# Altium PCB PCB2.PcbDoc
Units mm, origin at the board's own origin, x right, y up, seen from the top; angles counter-clockwise.
Board outline 40 x 20 mm, 2 copper layers (Top Layer, Bottom Layer); 17 components, 13 nets, 55 pads, 2 vias.
Unrouted connection lines stored in the file: 2.
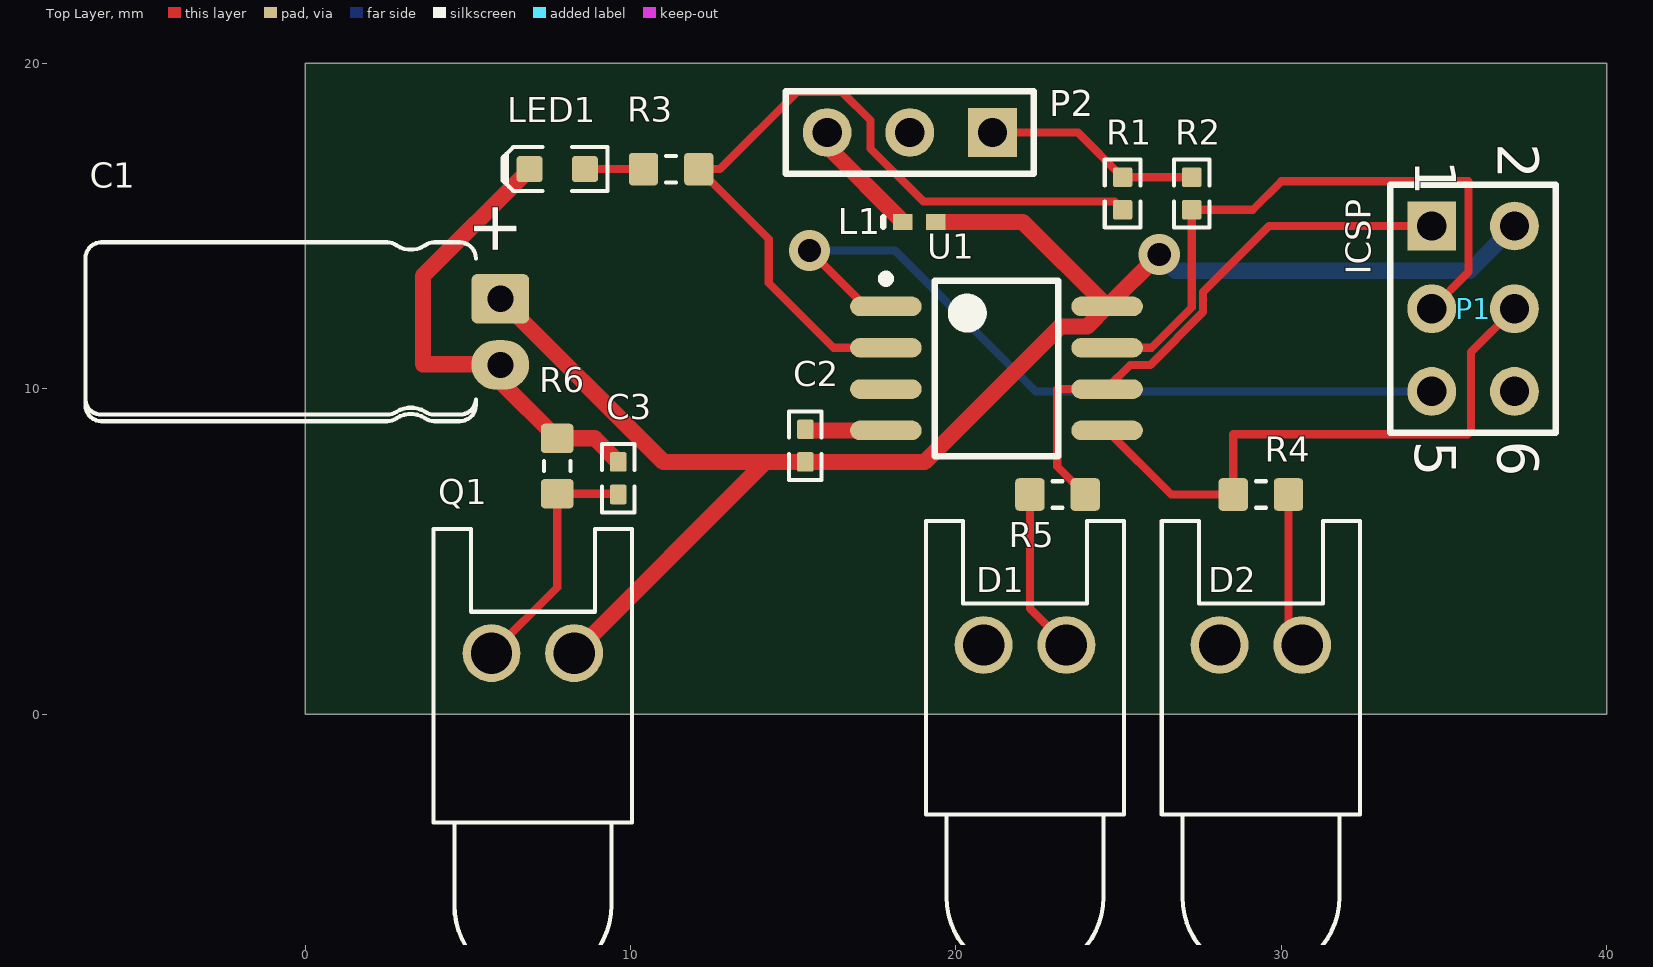
[diagram p0: Top Layer view]
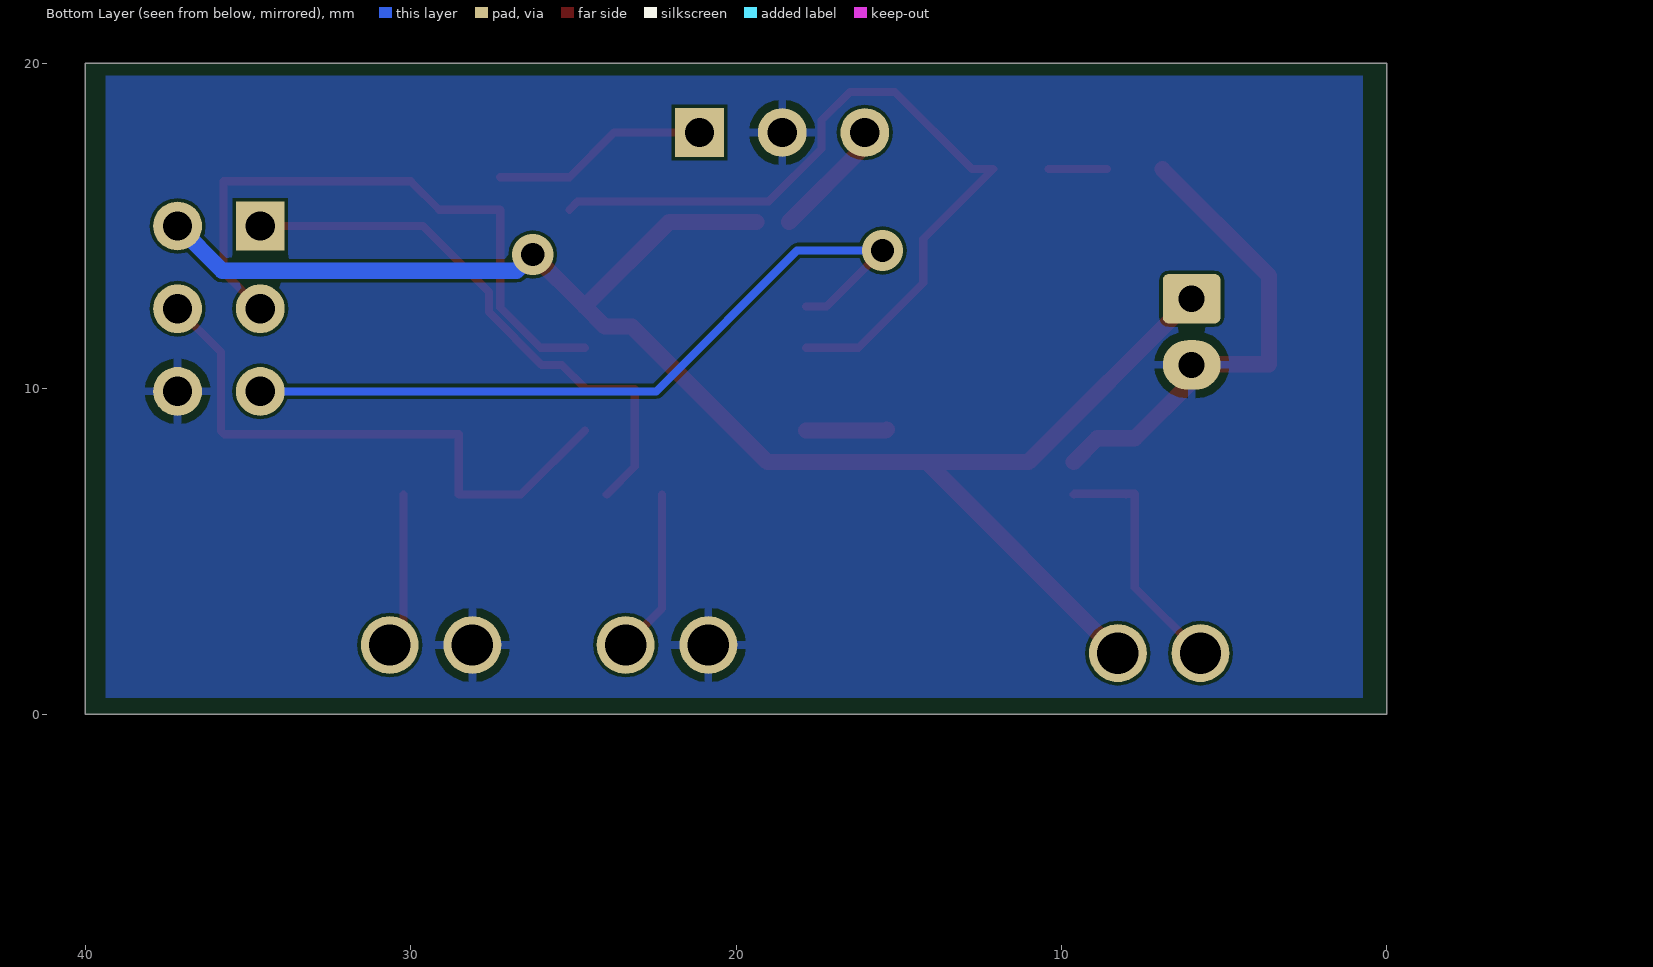
[diagram p1: Bottom Layer view, seen from below]
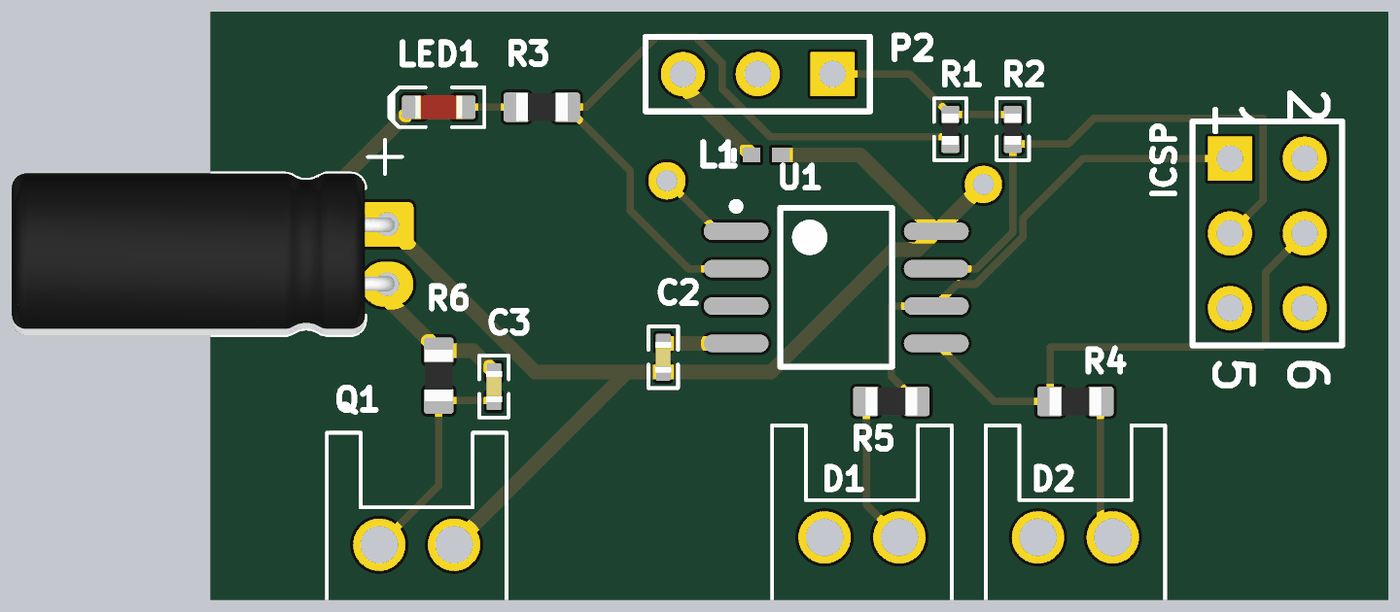
[diagram p2: 3D render of the assembled board from above, using the file's embedded part models]

## Layer stack, top to bottom
Top Solder: solder mask 0.0102, Solder Resist, Dk 3.5
Top Layer: signal copper 0.0356
Dielectric1: dielectric 0.32, FR-4, Dk 4.8
Bottom Layer: signal copper 0.0356
Bottom Solder: solder mask 0.0102, Solder Resist, Dk 3.5

## Board outline
0,0 0,20 40,20 40,0

## Design rules (kind name [scope] priority, off if disabled: settings)
Clearance [All] p1: gap=0.1
FabricationTestPointUsage TestPointUsage [All] p1: valid=0 allowmultiple=FALSE
FabricationTestpoint Testpoint [All] p1: side=3 testpointundercomponent=TRUE minsize=1.016 maxsize=2.54 preferedsize=1.524 minholesize=0 maxholesize=1.016 preferedholesize=0.813 testpointgrid=0.025 allowsidetop=TRUE allowsidebottom=TRUE usegrid=TRUE gridtolerance=0
PolygonConnect [All] p1: connectstyle=Relief reliefconductorwidth=0.254 reliefentries=4 polygonreliefangle="90 Angle" airgapwidth=0.254
RoutingVias [All] p1: holewidth=0.6 width=1 viastyle="Through Hole" minholewidth=0.6 minwidth=1 maxholewidth=0.6 maxwidth=1
SilkToSolderMaskClearance SilkscreenOverComponentPads [IsPad] p1: minsilkscreentomaskgap=0.254 clearancetoexposedcopper=TRUE
SolderMaskExpansion [All] p1: expansion=0.102
Width Width_Power [(InNet('5V') OR InNet('GND') OR InNet('VCC'))] p1: maxlimit=0.5 minlimit=0.2 preferedwidth=0.5 minimp=50.000000 maximp=50.000000 favimp=50.000000
Width [All] p2: maxlimit=0.25 minlimit=0.2 preferedwidth=0.25 minimp=50.000000 maximp=50.000000 favimp=50.000000
27 further rules are at their usual default settings.

## Components (designator, comment, footprint, x,y, rotation, side; value= is the part's Value field where it differs from the comment)
C1 "100µ" CAPAE200P550X1200_FLAT2 6,11.75 r90 top
C2 "100n" CAPC1005X55N 15.375,8.25 r270 top
C3 "1n" CAPC1005X55N 9.625,7.25 r90 top
D1 "GL480E" LED-0 22.125,2.125 r0 top
D2 "GL480E" LED-0 29.375,2.125 r0 top
L1 "Inductor" 0402-A 18.875,15.125 r0 top
LED1 "Red" LED-0603-RED 7.75,16.75 r180 top
P1 "ICSP" HDR2X3 34.625,15 r270 top
P2 "Header 3" HDR1X3 21.125,17.875 r180 top
Q1 "SFH3100F" LED-0 7,1.875 r0 top
R1 "Thick Film" RESC1005X40N 25.125,16 r90 top
R2 "Thick Film" RESC1005X40N 27.25,16 r90 top
R3 "Thick Film" RESC1608X55N 11.25,16.75 r180 top
R4 "Thick Film" RESC1608X55N 29.375,6.75 r180 top
R5 "Thick Film" RESC1608X55N 23.125,6.75 r0 top
R6 "Thick Film" RESC1608X55N 7.75,7.625 r270 top
U1 "ATtiny45-20SH" 8S2_N 21.25,10.625 r0 top

## Footprints (in the part's own frame and the unit in brackets; to place one, negate y for a bottom-side part, rotate by r counter-clockwise, add the part's x,y. Pads: shape width x height; smd on the part's side, far side on the other; paste and mask are expansions set on the pad)
8S2_N [mm] "SOP, 8-Leads, Body 5.3x5.3mm, Pitch 1.27mm, IPC Medium Density"
  oval 2.2x0.6 smd: 1(-3.4,1.905) 2(-3.4,0.635) 3(-3.4,-0.635) 4(-3.4,-1.905) 5(3.4,-1.905) 6(3.4,-0.635) 7(3.4,0.635) 8(3.4,1.905)
  silkscreen extent -3.52,-2.7 1.9,2.88, body extent -2.7,-2.68 2.7,2.68, height 2.16
0402-A [mm] "Chip Inductor, Body 1.0x0.5mm, IPC High Density"
  rect 0.6x0.5 smd: 1(-0.5,0) 2(0.5,0)
  silkscreen extent -1.1,-0.15 -1.1,0.15, body extent -0.55,-0.3 0.55,0.3, height 0.55
CAPAE200P550X1200_FLAT2 [mil]
  round 20 on Mech15: 0(0,0)
  rrect25% 60x70 hole 31.5: 1(40,0)
  oval 60x70 hole 31.5: 2(-40,0)
  silkscreen extent -108,30 108,502, body extent -107,-10 107,502, height 216
CAPC1005X55N [mm] "Chip Capacitor, Body 1.0x0.5mm, EIA 0402, IPC Medium Density"
  round 0.2 on Mech15: 0(0,0)
  rrect20% 0.6x0.5 smd: 1(-0.5,0) 2(0.5,0)
  Top Layer pour cut-out: -0.325,0.375 -0.2,0.5 0.2,0.5 0.325,0.375 0.325,-0.375 0.2,-0.5 -0.2,-0.5 -0.325,-0.375
  silkscreen extent -1.05,-0.5 1.05,0.5, body extent -0.52,-0.27 0.53,0.28, height 0.55
HDR1X3 [mm] "Connector; Header; 3 Position"
  rect 1.5x1.5 hole 0.9: 1(0,0)
  round 1.5 hole 0.9: 2(2.54,0) 3(5.08,0)
  silkscreen extent -1.27,-1.27 6.35,1.27
HDR2X3 [mm] "Connector; Header; 3x2 Position"
  rect 1.5x1.5 hole 0.9: 1(0,0)
  round 1.5 hole 0.9: 2(0,2.54) 3(2.54,0) 4(2.54,2.54) 5(5.08,0) 6(5.08,2.54)
  silkscreen extent -1.27,-1.27 6.35,3.81
LED-0 [mil] "LED; 2 Leads"
  round 70 hole 50: 1(50,0) 2(-50,0)
  silkscreen extent -120,-400 120,150
LED-0603-RED [mm]
  round 0.254 on Mech15: 0(0,0)
  rrect25% 0.8x0.8 smd: A(-0.85,0) K(0.85,0)
  Top Layer pour cut-out: -0.5,0.5 0.5,0.5 0.5,-0.5 -0.5,-0.5
  silkscreen extent -1.55,-0.68 1.68,0.67, body extent -0.8,-0.4 0.8,0.4, height 0.75
RESC1005X40N [mm] "Chip Resistor, Body 1.0x0.5mm, EIA 0402, IPC Medium Density"
  round 0.2 on Mech15: 0(0,0)
  rrect20% 0.6x0.6 smd: 1(-0.5,0) 2(0.5,0)
  Top Layer pour cut-out: -0.325,0.375 -0.2,0.5 0.2,0.5 0.325,0.375 0.325,-0.375 0.2,-0.5 -0.2,-0.5 -0.325,-0.375
  silkscreen extent -1.05,-0.55 1.05,0.55, body extent -0.52,-0.27 0.53,0.28, height 0.4
RESC1608X55N [mm] "Chip Resistor, Body 1.6x0.8mm, EIA 0603, IPC Medium Density"
  round 0.254 on Mech15: 0(0,0)
  rrect25% 0.9x1 smd: 1(-0.85,0) 2(0.85,0)
  Top Layer pour cut-out: -0.6,0.5 -0.4,0.7 0.4,0.7 0.6,0.5 0.6,-0.5 0.4,-0.7 -0.4,-0.7 -0.6,-0.5
  silkscreen extent -0.15,-0.41 0.15,0.41, body extent -0.87,-0.47 0.88,0.48, height 0.54

## Part data
C1: library part CAPE_100u_16V_THD, "Capacitor THD Electrolytic 100uF 20% 16V Radial"
C2: library part CAPC_100n_0402_X5R_16V_10%, "Capacitor SMD Cer 100nF 10% 16V X5R 0402"
C3: library part CAPC_1n_0402_X7R_16V_10%, "Capacitor SMD Cer 1nF 10% 16V X7R 0402"
D1 D2: library part LED0, "Typical INFRARED GaAs LED"
LED1: library part LED_SMD_Red_0603_220mcd, "LED 0603 SMD Hyper Red 630nm 220mcd 20mA"
P1: library part "Header 3X2", "Header, 3-Pin, Dual row"
P2: "Header, 3-Pin"
Q1: library part LED0, "IR Phototransistor"
R1 R2: library part RES_10K_0402_1%, "Resistor SMD chip 10k Ohm 0.063W 1% 0402"
R3: library part RES_330R_0603_5%, "Resistor SMD chip 330 Ohm 0.1W 5% 0603"
R4 R5 R6: library part RES_2K2_0603_5%, "Resistor SMD chip 2.2k Ohm 0.1W 5% 0603"
U1: "8-bit AVR Microcontroller, 20MHz, 2.7-5.5V, 4K Flash, 256 Bytes EEPROM, 256 Bytes SRAM, Industrial Grade (-40°C to 85°C), 8-Lead SOIC, Pb-Free"

## Via types
v1: diameter 1.27, hole 0.711, Top Layer to Bottom Layer, 2 vias

## Nets (pads, with @x,y where several pads share a name; then routed paths per layer and width w, separated by ;. In a path a pad name is that pad's centre, name@x,y a point inside that pad or via, vN(x,y) a via of type N, cw(c..) or ccw(c..) an arc to the next point about the centre after c; other vN are vias at no path point)
5V: C1.1 C2.2 L1.2 P1.2 Q1.1 U1.8 | length 51.5
  Top Layer w0.5: C1.1 11.016,7.75 14.145,7.75 ; Q1.1 14.145,7.75 ; L1.2 22.055,15.125 U1.8 ; v1(26.25,14.125) 24.655,12.53 U1.8 ; 14.145,7.75 C2.2 19.04,7.75 23.2,11.91 24.03,11.91 U1.8
  Bottom Layer w0.5: v1@26.125,14.25 26.75,13.625 35.79,13.625 P1.2
GND: C1.2 C2.1 C3.2 D1.2 D2.2 LED1.K P1.6 P2.2 R6.1 U1.4 | length 17.9
  Top Layer w0.5: C1.2 6,10.225 R6.1 8.9,8.475 C3.2 ; C1.2@6,10.75 3.625,10.75 3.625,13.475 LED1.K ; C2.1 15.405,8.72 U1.4 ; D1.2 D1.2@21.375,2.125
NetC3_1: C3.1 Q1.2 R6.2 U1.3 | length 7.7
  Top Layer w0.25: Q1.2 7.75,3.895 R6.2 R6.2@8,6.775 ; R6.2@8.025,6.75 R6.2@8,6.775 ; C3.1 9.6,6.775 R6.2@8,6.775
NetD1_1: D1.1 R5.1 | length 5.1
  Top Layer w0.25: R5.1 22.275,3.245 D1.1
NetD2_1: D2.1 R4.1 | length 4.8
  Top Layer w0.25: R4.1 30.225,2.545 D2.1
NetLED1_A: LED1.A R3.2 | length 1.8
  Top Layer w0.25: LED1.A R3.2
NetP1_1: P1.1 R5.2 U1.6 | length 17.6
  Top Layer w0.25: R5.2 23.115,7.61 23.115,9.99 U1.6 24.65,10.025 25.36,10.735 25.98,10.735 27.6,12.355 27.6,12.975 29.625,15 P1.1
NetP1_3: P1.3 R2.1 U1.7 | length 19.4
  Top Layer w0.25: U1.7 26.01,11.26 27.25,12.5 R2.1 29.125,15.5 30,16.375 35.75,16.375 35.75,13.585 P1.3
NetP1_4: P1.4 R4.2 U1.5 | length 18.2
  Top Layer w0.25: U1.5 26.62,6.75 R4.2 28.525,8.6 35.725,8.6 35.83,8.705 35.83,11.125 P1.4
NetP1_5: P1.5 U1.1 | length 24
  Top Layer w0.25: v1(15.5,14.25) 17.22,12.53 U1.1
  Bottom Layer w0.25: v1(15.5,14.25) 18.125,14.25 22.455,9.92 P1.5
NetR1_1: R1.1 R3.1 U1.2 | length 24.8
  Top Layer w0.25: U1.2 16.24,11.26 14.25,13.25 14.25,14.6 R3.1 12.75,16.75 15.125,19.125 16.5,19.125 17.375,18.25 17.375,17.375 19,15.75 24.875,15.75 R1.1
SIG: P2.1 R1.2 R2.2 | length 6.7
  Top Layer w0.25: P2.1 23.75,17.875 R1.2 R2.2
VCC: L1.1 P2.3 | length 3.7
  Top Layer w0.5: P2.3 16.045,17.455 L1.1
pads on no net: C1.0 C2.0 C3.0 LED1.0 R1.0 R2.0 R3.0 R4.0 R5.0 R6.0

## Polygon pours and split planes (outlines as drawn)
GND on Bottom Layer "GND - BottomLayer" (solid, pour order 0): 0.75,19.625 39.375,19.625 39.375,0.5 37.75,0.5 0.75,0.5

## Silkscreen, mask and mechanical layers (free items; w line width, h text height)
Mechanical 16:
  drawing of 1874 lines, arcs and shapes, not listed
  text "1" at -104.286,110.509 h0.76
  text "2" at -31.642,110.509 h0.76
  text "3" at 41.51,110.509 h0.76
  text "4" at 114.408,110.509 h0.76
  text "A" at -138.627,87.497 h0.76
  text "A" at 148.393,87.497 h0.76
  text "B" at -138.627,39.44 h0.76
  text "B" at 148.393,39.44 h0.76
  text "C" at -138.627,-9.074 h0.76
  text "C" at 148.393,-9.074 h0.76
  text "ENGINEER:" at 33.458,-46.082 h0.76
  text "TITLE:" at 71.558,-46.082 h0.76
  text "PCB DESIGNER:" at 33.458,-53.575 h0.76
  text "D" at -138.627,-57.08 h0.76
  text "D" at 148.393,-57.08 h0.76
  text "DATE:" at 33.458,-61.322 h0.76
  text "PART NO.:" at 71.558,-61.322 h0.76
  text "REV:" at 124.898,-61.322 h0.76
  text "Altium Limited" at 0.438,-63.862 h0.76
  text ".PRINT_DATE" at 34.728,-64.37 h0.76
  text "12a Rodborough Rd" at 0.438,-66.402 h0.76
  text "Frenchs Forest" at 0.438,-68.942 h0.76
  text "FILE NAME:" at 33.458,-68.942 h0.76
  text "DWG NO:" at 71.558,-68.942 h0.76
  text "SCALE:" at 124.898,-68.942 h0.76
  text "NSW 2086" at 0.438,-71.482 h0.76
  text ".PCB_FILE_NAME_NO_PATH" at 34.728,-71.99 h0.76
  text "1" at -104.286,-77.451 h0.76
  text "2" at -31.642,-77.451 h0.76
  text "3" at 41.51,-77.451 h0.76
  text "4" at 114.408,-77.451 h0.76

## Text inside footprints (layer, text, board x,y; h text height)
C1: Top Overlay "+" at 6.508,14.036 h1.52 r90
P1: Top Overlay "1" at 34.117,17.032 h1.27 r270; Top Overlay "2" at 36.657,17.54 h1.27 r270; Top Overlay "5" at 34.117,8.396 h1.27 r270; Top Overlay "6" at 36.657,8.396 h1.27 r270